# Altium PCB UmbilicalBoardV5.PcbDoc
Units mm, origin at the board's own origin, x right, y up, seen from the top; angles counter-clockwise.
Board outline 89.42 x 93.65 mm, 4 copper layers (Top Layer, GndPlane, PowerPlane, Bottom Layer), stack 0.107 mm thick; 25 components, 56 nets, 222 pads, 36 vias.
Unrouted connection lines stored in the file: 20.
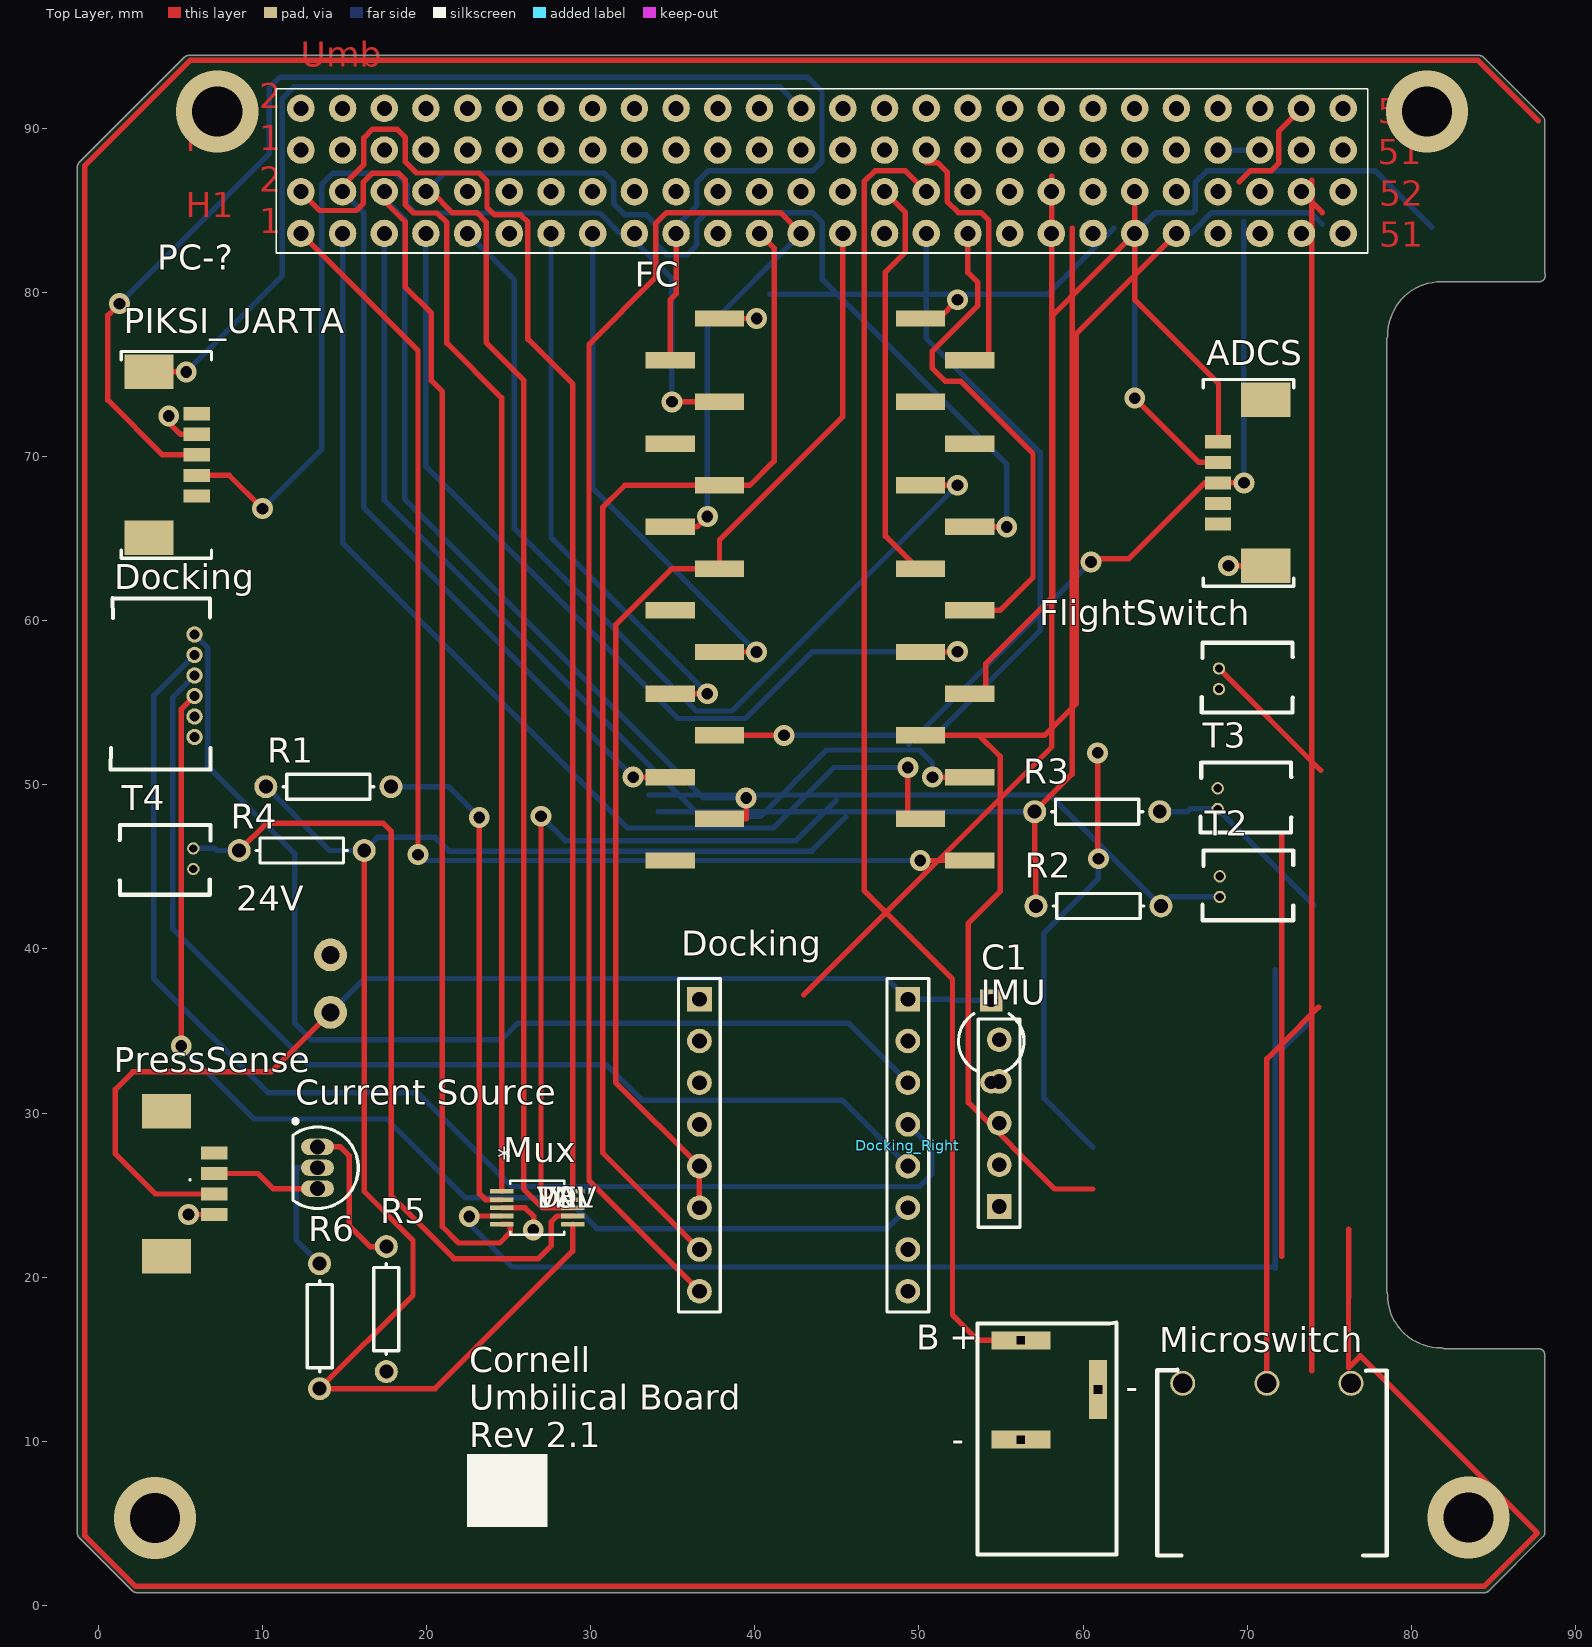
[diagram p0: Top Layer view]
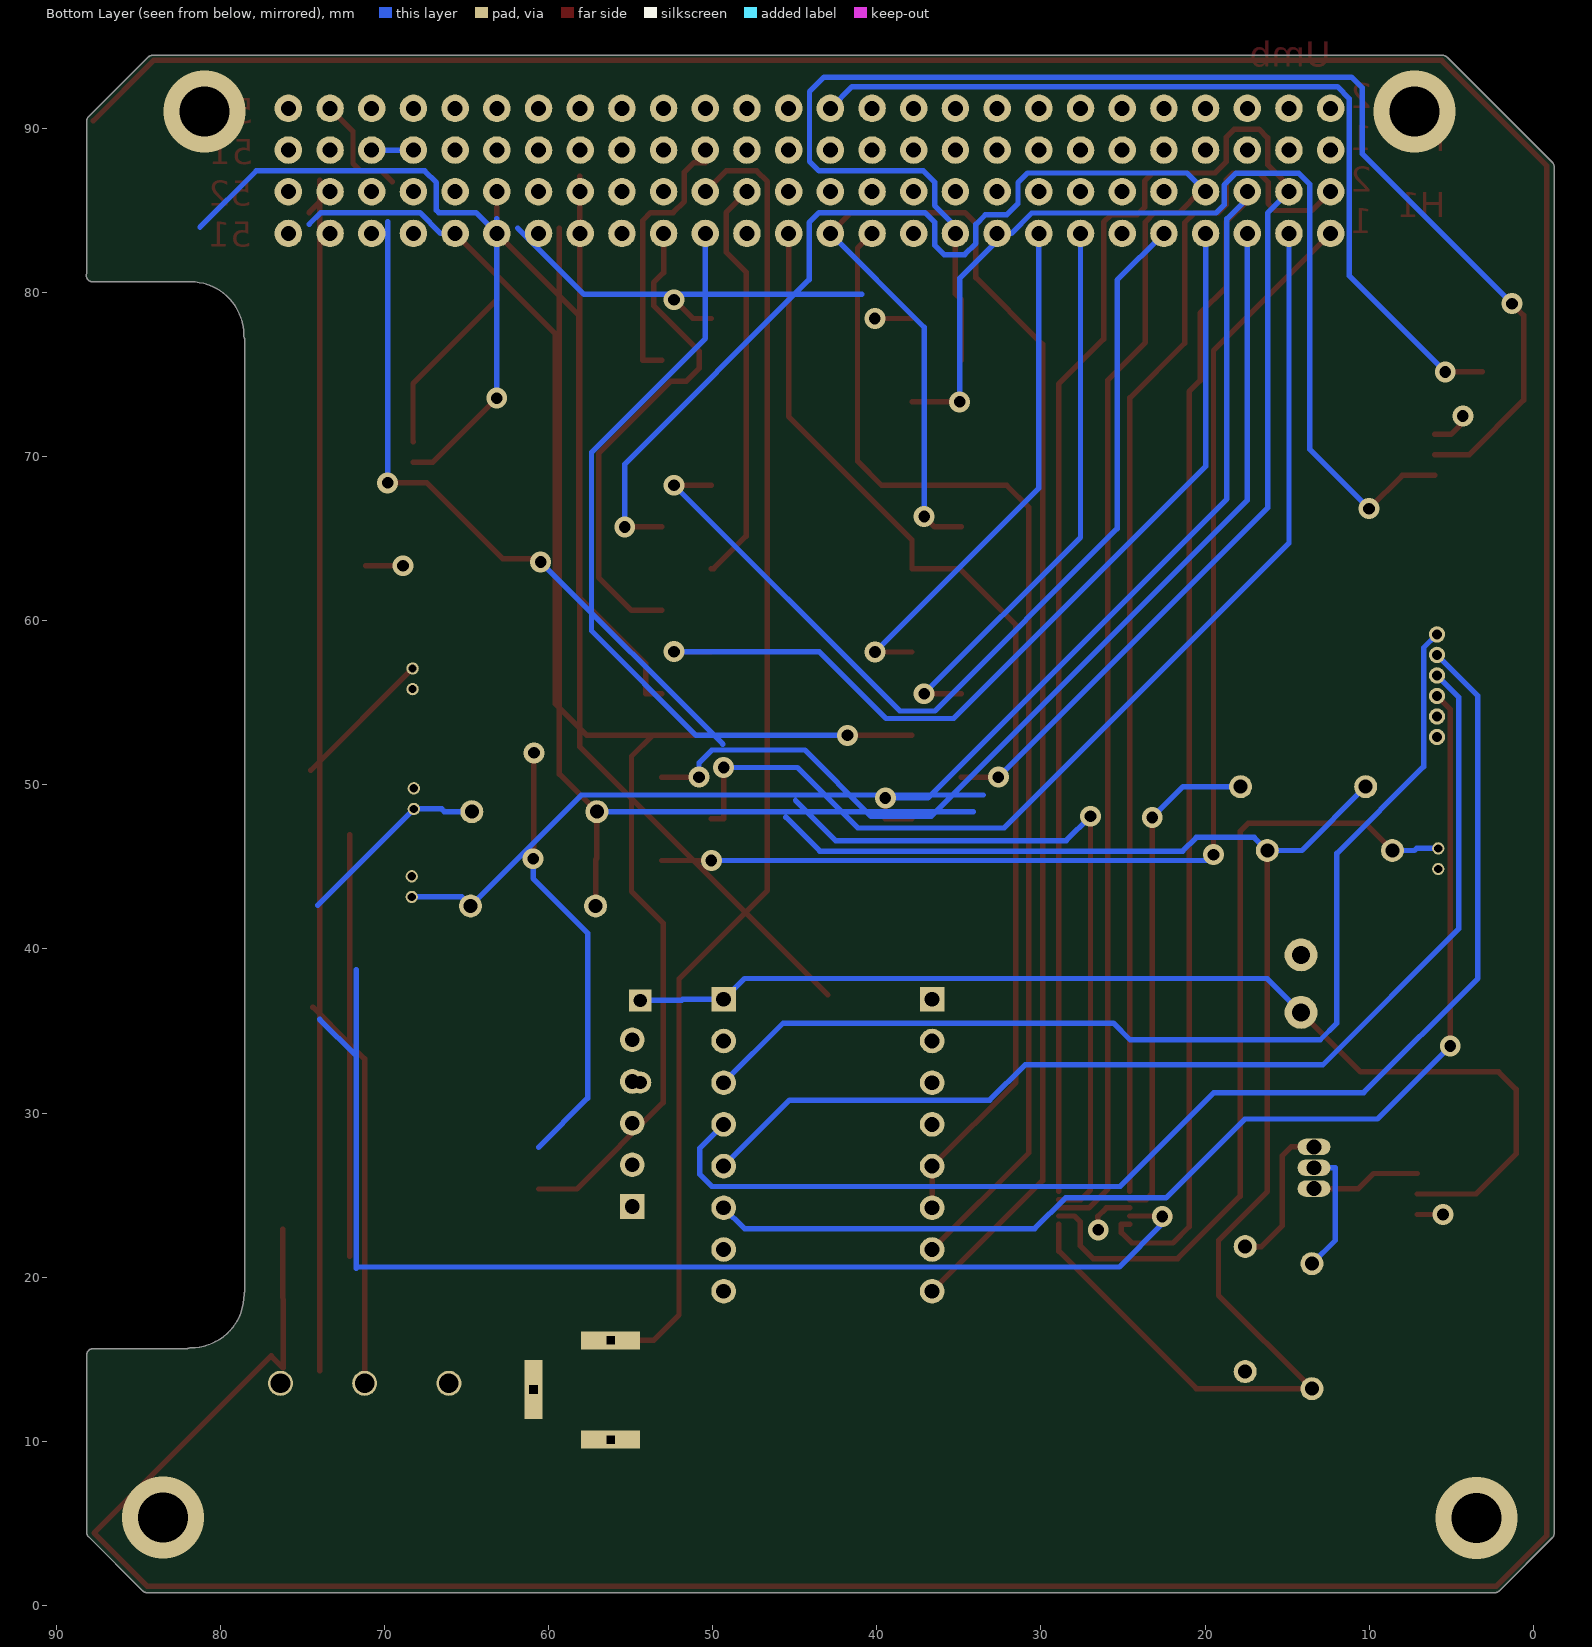
[diagram p1: Bottom Layer view, seen from below]
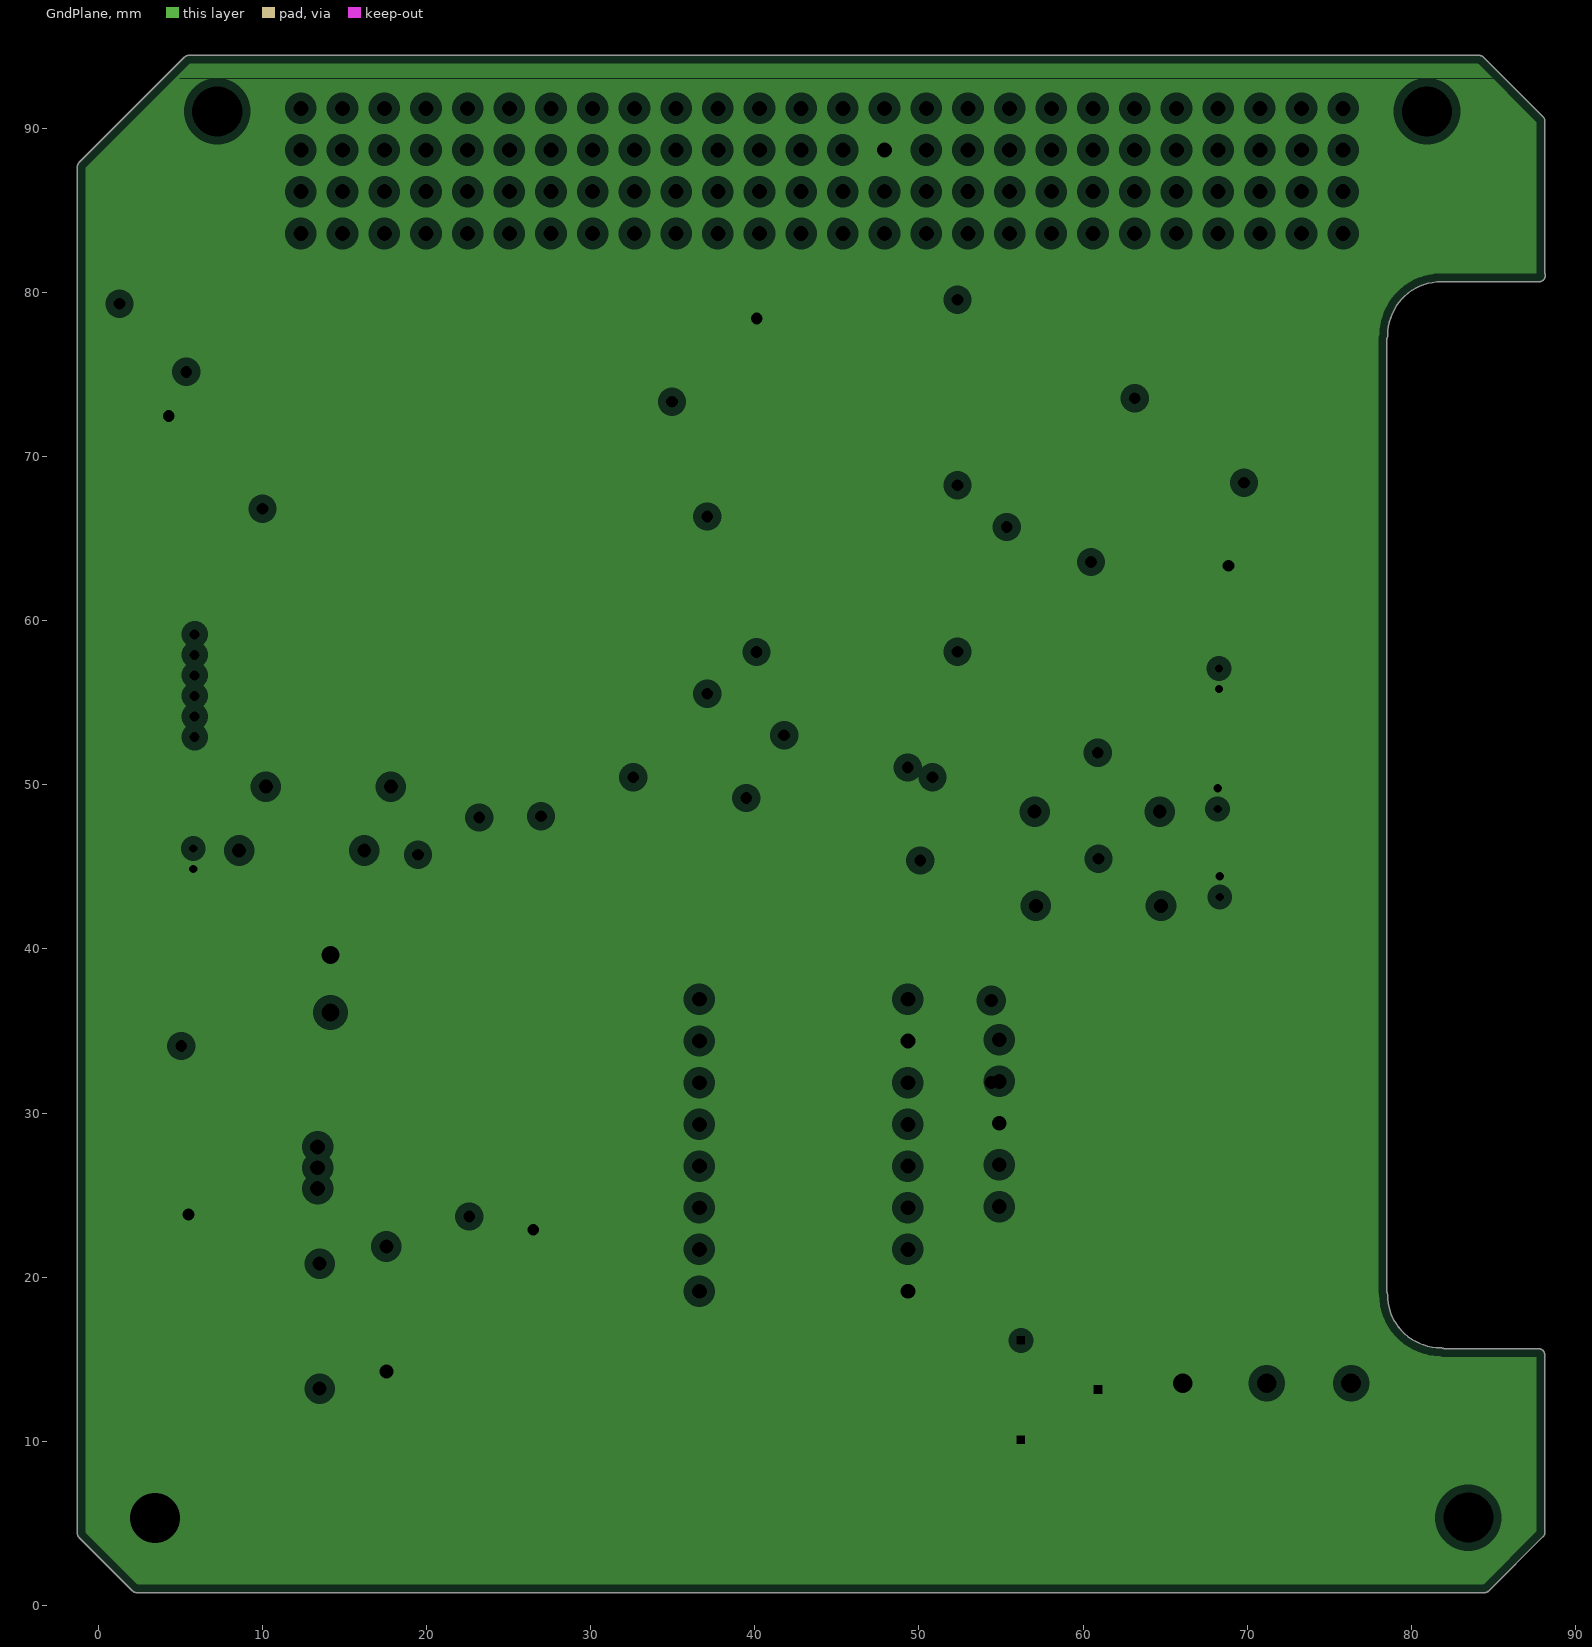
[diagram p2: GndPlane, clearances drawn from the general rule]
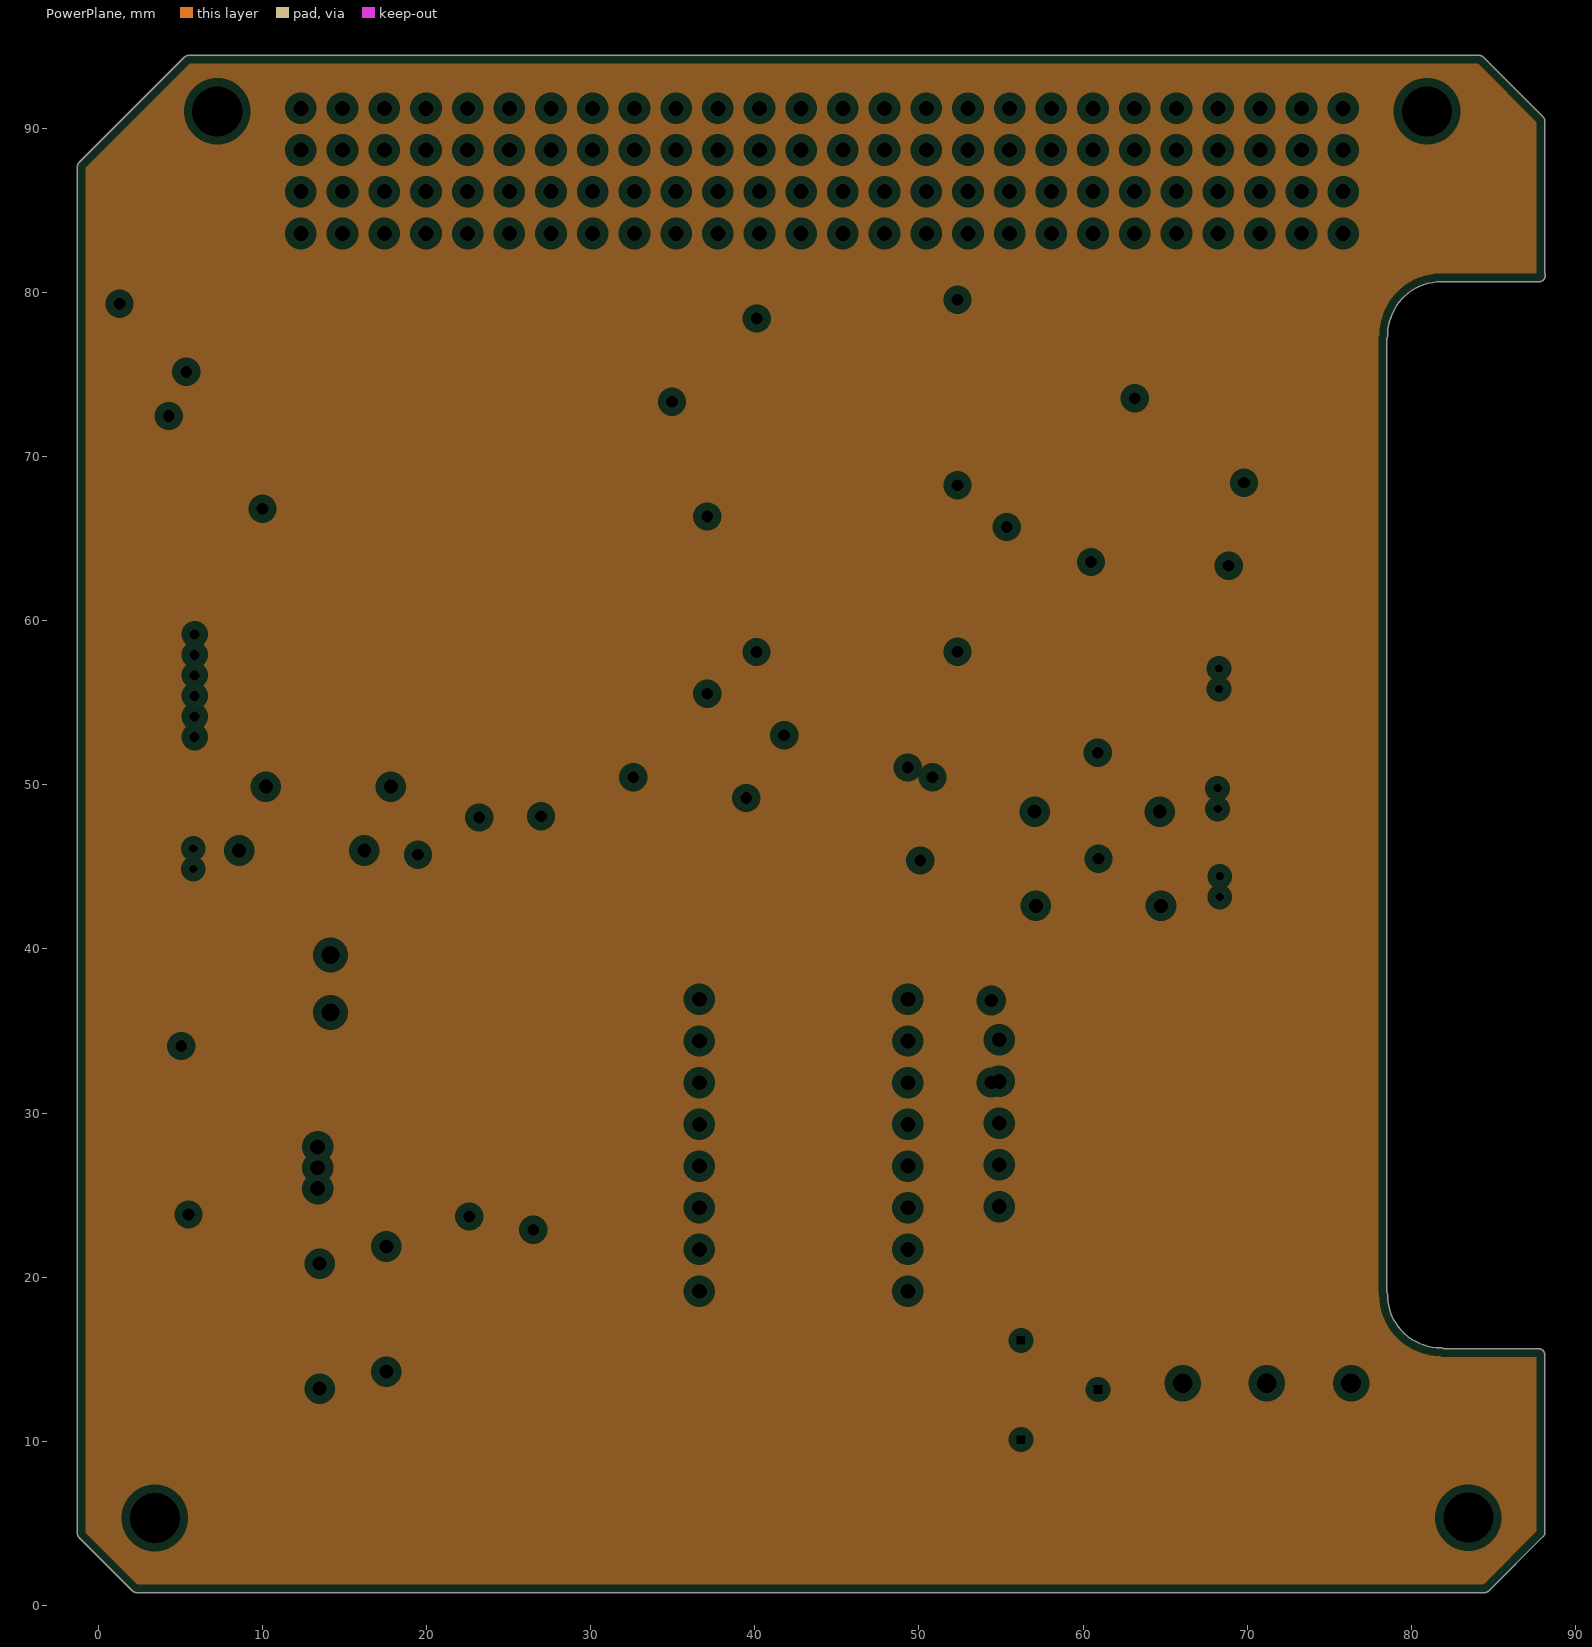
[diagram p3: PowerPlane, clearances drawn from the general rule]

## Layer stack, top to bottom
Top Solder: solder mask 0.0102, Solder Resist, Dk 3.5
Top Layer: signal copper 0.0356
GndPlane: plane copper 0.0178, net DGND
PowerPlane: plane copper 0.0178
Bottom Layer: signal copper 0.0356
Bottom Solder: solder mask 0.0102, Solder Resist, Dk 3.5

## Board outline
2.067,0.899 -1.159,4.125 -1.158,4.124 cw(c-0.889,4.394) -1.27,4.394 -1.27,87.655 cw(c-0.889,87.655) -1.158,87.925 -1.159,87.925 5.242,94.326 cw(c5.512,94.056) 5.512,94.438 84.125,94.438 cw(c84.125,94.056) 84.395,94.326 84.394,94.326 88.027,90.694 88.026,90.694 cw(c87.757,90.424) 88.138,90.424 88.138,81.204 cw(c87.757,81.204) 88.134,81.146 cw(c87.772,81.026) 88.153,81.026 cw(c87.772,81.026) 87.772,80.645 81.803,80.645 cw(c81.803,81.026) 81.802,80.645 ccw(c81.798,77.406) 78.56,77.389 cw(c78.178,77.387) 78.56,77.387 cw(c78.178,77.387) 78.512,77.202 78.512,19.11 cw(c78.163,18.956) 78.545,18.956 cw(c78.163,18.956) 78.545,18.953 ccw(c81.783,18.936) 81.787,15.698 cw(c81.788,15.316) 81.978,15.647 87.747,15.647 cw(c87.747,15.265) 88.128,15.265 88.128,4.558 cw(c87.757,4.47) 88.138,4.47 cw(c87.757,4.47) 88.027,4.201 84.725,0.899 cw(c84.455,1.168) 84.455,0.787 2.337,0.787 cw(c2.337,1.168)

## Design rules (kind name [scope] priority, off if disabled: settings)
Clearance [All] p1: gap=0.254 ignorepadtopadclearanceinfootprint=FALSE except(0: Arc-Hole Track-Hole SMDPad-Hole THPad-Hole Via-Hole Fill-Hole Poly-Hole Region-Hole Text-Hole; 0.127: Track-Track Track-SMDPad Track-THPad SMDPad-SMDPad SMDPad-THPad THPad-THPad)
HoleSize [All] p1: absolutevalues=TRUE maxlimit=3.048 minlimit=0.025 maxpercent=80.000 minpercent=20.000
MinimumSolderMaskSliver [All] p1: minsoldermaskwidth=0.127
PlaneClearance [All] p1: clearance=0.508
PlaneConnect [All] p1: planeconnectstyle=Direct reliefexpansion=0.508 reliefentries=4 reliefconductorwidth=0.254 reliefairgap=0.254
PolygonConnect [All] p1: connectstyle=Direct reliefconductorwidth=0.254 reliefentries=4 polygonreliefangle="90 Angle" airgapwidth=0.254
RoutingVias [All] p1: holewidth=0.711 width=1.27 viastyle="Through Hole" minholewidth=0.711 minwidth=1.27 maxholewidth=0.711 maxwidth=1.27
SilkToSolderMaskClearance [IsPad] p1: minsilkscreentomaskgap=0.05 clearancetoexposedcopper=TRUE
SolderMaskExpansion [All] p1: expansion=0.102
Width [All] p1: maxlimit=0.559 minlimit=0.305 preferedwidth=0.33
25 further rules are at their usual default settings.

## Components (designator, comment, footprint, x,y, rotation, side; value= is the part's Value field where it differs from the comment)
24V "HighVoltageHeader" Header 0.991,41.885 r270 top
ADCS "ADCS" "MOLEX PICOBLADE 5 PIN" 72.624,62.297 r90 top
B "Barrel_Jack" BARREL_JACK 56.209,10.107 r0 top
C1 "Cap2" CAPR5-4X5 54.407,34.366 r270 top value=100uF
"Current Source" "2N3904" TO-92A 13.36,26.67 r180 top
Docking "Docking DRV8825 Header" HDR1X8 36.627,36.932 r270 top (schematic designator Docking_Left)
Docking "Docking 6 Pin molex" "PRESSURE CONNECTOR" 7.067,56.287 r270 top
Docking_Right "Docking DRV8825 Header" HDR1X8 49.327,36.932 r270 top
FC "Teensy 3.2 Headers" "Teensy 3.2 SMD Headers" 34.849,78.41 r0 top
FlightSwitch "RemoverBeforeFlightSwitch" "REMOVERBEFOREFLIGHT SWITCH" 68.275,53.879 r90 top
IMU "Header 5" HDR1X5 54.889,24.308 r90 top
Microswitch "MicroSwitch" MICROSWITCH_3PIN 71.246,13.588 r180 top
Mux "MAX4634EUB+T" 21-0061L 26.746,24.232 r0 top value=Value
PC-? "PC-104" PC-104FOOTPRINT 12.344,83.591 r0 top
PIKSI_UARTA "PIKSI_UART Connector" "MOLEX PICOBLADE 5 PIN" 1.594,76.204 r270 top
PressSense "Connector 4POS Molex PicoBlade" 532610471 7.061,23.82 r0 top
R1 "Resistor" AXIAL-0.3 14.021,49.886 r0 top value=1K
R2 "Resistor" AXIAL-0.3 60.935,42.621 r0 top value=1K
R3 "Resistor" AXIAL-0.3 60.858,48.362 r0 top value=1K
R4 "Resistor" AXIAL-0.3 12.395,45.999 r180 top value=1K
R5 "Resistor" AXIAL-0.3 17.551,18.059 r90 top value=2.8k
R6 "Resistor" AXIAL-0.3 13.487,17.018 r270 top value=1k
T2 "TempSensor1" "REMOVERBEFOREFLIGHT SWITCH" 68.326,41.22 r90 top
T3 "TempSensor1" "REMOVERBEFOREFLIGHT SWITCH" 68.199,46.579 r90 top
T4 "TempSensor2" "REMOVERBEFOREFLIGHT SWITCH" 5.791,48.076 r270 top

## Footprints (in the part's own frame and the unit in brackets; to place one, negate y for a bottom-side part, rotate by r counter-clockwise, add the part's x,y. Pads: shape width x height; smd on the part's side, far side on the other; paste and mask are expansions set on the pad)
21-0061L [mil]
  rect 56x11 smd: 1(-85.5,39.37) 2(-85.5,19.69) 3(-85.5,0) 4(-85.5,-19.68) 5(-85.5,-39.37) 6(85.5,-39.37) 7(85.5,-19.68) 8(85.5,0) 9(85.5,19.69) 10(85.5,39.37)
  silkscreen extent -65,-65 134,65, body extent 0,0 10,10, height 10
532610471 [mm] "Connector 4POS Molex PicoBlade"
  rect 1.6x0.8 smd: 1(0,3.75) 2(0,2.5) 3(0,1.25) 4(0,0)
  rect 3x2.1 smd: ""(-2.9,-2.55) ""(-2.9,6.3)
  silkscreen extent -1.52,2.07 -1.42,2.17, body extent -4.71,-3.81 1.02,7.56, height 0.6
AXIAL-0.3 [mm] "Axial Device, Thru-Hole; 2 Leads; 0.3 in Pin Spacing"
  round 1.4 hole 0.85: 1(-3.81,0) 2(3.81,0)
  silkscreen extent -2.77,-0.76 2.77,0.76
BARREL_JACK [mm] "KLDX-0202-B"
  rect 3.6x1.1 hole 0.5 square: 0(0,0) 2(0,6.05)
  rect 1.1x3.6 hole 0.5 square: 1(4.7,3.05)
  silkscreen extent -2.65,-7 5.82,7.12
CAPR5-4X5 [mm] "Capacitor; 2 Leads"
  rect 1.35x1.35 hole 0.8: 1(-2.5,0)
  round 1.35 hole 0.8: 2(2.5,0)
  silkscreen extent -1.69,-2 1.82,2
HDR1X5 [mm] "Connector; Header; 5 Position"
  rect 1.5x1.5 hole 0.9: 1(0,0)
  round 1.5 hole 0.9: 2(2.54,0) 3(5.08,0) 4(7.62,0) 5(10.16,0)
  silkscreen extent -1.27,-1.27 11.43,1.27
HDR1X8 [mm] "Connector; Header; 8 Position"
  rect 1.5x1.5 hole 0.9: 1(0,0)
  round 1.5 hole 0.9: 2(2.54,0) 3(5.08,0) 4(7.62,0) 5(10.16,0) 6(12.7,0) 7(15.24,0) 8(17.78,0)
  silkscreen extent -1.27,-1.27 19.05,1.27
Header [mm] "High Voltage Connector"
  round 2 hole 1.1: 1(5.75,13.16) 2(2.25,13.16)
  body extent 1.02,0.89 6.86,14.6, height 0.25
MICROSWITCH_3PIN [mm] "Omron Electronics Inc-EMC Div D2FS-FL-N-A1"
  round 1.524 hole 1.2: 1(-5.08,0.05) 2(0.05,0.05) 3(5.18,0.05)
  silkscreen extent -7.25,-0.77 6.73,10.55, body extent -7.25,-0.75 6.73,10.55
"MOLEX PICOBLADE 5 PIN" [mm] "Molex Picoblade Header, SMT, Right Angle  53261-0571"
  rect 0.8x1.6 smd: 1(3.6,4.4) 2(4.85,4.4) 3(6.1,4.4) 4(7.35,4.4) 5(8.6,4.4)
  rect 2.1x3 smd: ""(1.05,1.5) ""(11.15,1.5)
  silkscreen extent -0.2,-0.2 12.4,5.3, body extent 0.4,0 11.8,5.2, height 3.4
PC-104FOOTPRINT [mm]
  round 1.676 hole 0.914 mask+0.076: H1_1(0,0) H1_2(0,2.54) H1_3(2.54,0) H1_4(2.54,2.54) H1_5(5.08,0) H1_6(5.08,2.54) H1_7(7.62,0) H1_8(7.62,2.54) H1_9(10.16,0) H1_10(10.16,2.54) H1_11(12.7,0) H1_12(12.7,2.54) H1_13(15.24,0) H1_14(15.24,2.54) H1_15(17.78,0) H1_16(17.78,2.54) H1_17(20.32,0) H1_18(20.32,2.54) H1_19(22.86,0) H1_20(22.86,2.54) H1_21(25.4,0) H1_22(25.4,2.54) H1_23(27.94,0) H1_24(27.94,2.54) H1_25(30.48,0) H1_26(30.48,2.54) H1_27(33.02,0) H1_28(33.02,2.54) H1_29(35.56,0) H1_30(35.56,2.54) H1_31(38.1,0) H1_32(38.1,2.54) H1_33(40.64,0) H1_34(40.64,2.54) H1_35(43.18,0) H1_36(43.18,2.54) H1_37(45.72,0) H1_38(45.72,2.54) H1_39(48.26,0) H1_40(48.26,2.54) H1_41(50.8,0) H1_42(50.8,2.54) H1_43(53.34,0) H1_44(53.34,2.54) H1_45(55.88,0) H1_46(55.88,2.54) H1_47(58.42,0) H1_48(58.42,2.54) H1_49(60.96,0) H1_50(60.96,2.54) H1_51(63.5,0) H1_52(63.5,2.54) H2_1(0,5.08) H2_2(0,7.62) H2_3(2.54,5.08) H2_4(2.54,7.62) H2_5(5.08,5.08) H2_6(5.08,7.62) H2_7(7.62,5.08) H2_8(7.62,7.62) H2_9(10.16,5.08) H2_10(10.16,7.62) H2_11(12.7,5.08) H2_12(12.7,7.62) H2_13(15.24,5.08) H2_14(15.24,7.62) H2_15(17.78,5.08) H2_16(17.78,7.62) H2_17(20.32,5.08) H2_18(20.32,7.62) H2_19(22.86,5.08) H2_20(22.86,7.62) H2_21(25.4,5.08) H2_22(25.4,7.62) H2_23(27.94,5.08) H2_24(27.94,7.62) H2_25(30.48,5.08) H2_26(30.48,7.62) H2_27(33.02,5.08) H2_28(33.02,7.62) H2_29(35.56,5.08) H2_30(35.56,7.62) H2_31(38.1,5.08) H2_32(38.1,7.62) H2_33(40.64,5.08) H2_34(40.64,7.62) H2_35(43.18,5.08) H2_36(43.18,7.62) H2_37(45.72,5.08) H2_38(45.72,7.62) H2_39(48.26,5.08) H2_40(48.26,7.62) H2_41(50.8,5.08) H2_42(50.8,7.62) H2_43(53.34,5.08) H2_44(53.34,7.62) H2_45(55.88,5.08) H2_46(55.88,7.62) H2_47(58.42,5.08) H2_48(58.42,7.62) H2_49(60.96,5.08) H2_50(60.96,7.62) H2_51(63.5,5.08) H2_52(63.5,7.62)
  silkscreen extent -1.5,-1.19 65,8.81
"PRESSURE CONNECTOR" [mm] "53048-0610"
  round 1 hole 0.6 mask+0.076: 1(-2.875,-1.2) 2(-1.625,-1.2) 3(-0.375,-1.2) 4(0.875,-1.2) 5(2.125,-1.2) 6(3.375,-1.2)
  silkscreen extent -5.07,-6.32 5.35,-0.23, body extent -4.45,-6.08 4.8,-0.58, height 1.75
"REMOVERBEFOREFLIGHT SWITCH" [mm] "Molex Picoblade Part Number: 53048-0210"
  round 0.75 hole 0.5: 1(1.95,0) 2(3.205,0)
  silkscreen extent 0.53,-4.5 4.78,1.05, body extent 0.53,-4.47 4.78,1.03, height 4.05
"Teensy 3.2 SMD Headers" [mm]
  rect 3x1 smd: 1(3,0) 2(0,-2.54) 3(3,-5.08) 4(0,-7.62) 5(3,-10.16) 6(0,-12.7) 7(3,-15.24) 8(0,-17.78) 9(3,-20.32) 10(0,-22.86) 11(3,-25.4) 12(0,-27.94) 13(3,-30.48) 14(0,-33.02) 20(18.24,-33.02) 21(15.24,-30.48) 22(18.24,-27.94) 23(15.24,-25.4) 24(18.24,-22.86) 25(15.24,-20.32) 26(18.24,-17.78) 27(15.24,-15.24) 28(18.24,-12.7) 29(15.24,-10.16) 30(18.24,-7.62) 31(15.24,-5.08) 32(18.24,-2.54) 33(15.24,0)
  body extent -1.09,-34.49 19.35,1.16, height 0.25
TO-92A [mm] "TO, Flat Index; 3 In-Line, Axial Leads; Body Dia. 4.5mm; Leads 0.51 x 0.48 mm (max)"
  oval 2x1 hole 0.9: 1(0,-1.27) 2(0,0) 3(0,1.27)
  silkscreen extent -2.48,-2.95 1.5,2.48, body extent -2.48,-2.5 1.5,2.5, height 6.86

## Part data
ADCS: library part "PIKSI_UART Connector", "Molex Picoblade 53261-0571"
C1: "Capacitor", PackageDescription="Capacitor; 2 Leads", PackageReference=CAPR5-4X5, Published=23-Sep-2002, Publisher="Altium Limited"
"Current Source": "NPN General Purpose Amplifier", ComponentLink1Description="Manufacturer Link", ComponentLink1URL=http://www.fairchildsemi.com/, ComponentLink2Description=Datasheet, ComponentLink2URL=http://www.fairchildsemi.com/ds/2N%2F2N3904.pdf, DatasheetVersion=1997, LatestRevisionDate=15-Jan-2003, LatestRevisionNote="PCB Footprint 'BCY-W3/D4.7' replaced", PackageDescription="TO, Flat Index; 3 In-Line, Axial Leads; Body Dia. 4.5mm; Leads 0.51 x 0.48 mm (max)", PackageReference=TO-92A, PackageVersion=Sep-1998, Published=8-Jun-2000, Publisher="Altium Limited"
Docking Docking_Right: library part "Header 8", "Header, 8-Pin", LatestRevisionDate=17-Jul-2002, LatestRevisionNote="Re-released for DXP Platform.", Publisher="Altium Limited"
Docking: library part PressureConnector, "Molex 70553-0005"
FlightSwitch: "53048-0210 Molex Picoblade"
IMU: "Header, 5-Pin", LatestRevisionDate=17-Jul-2002, LatestRevisionNote="Re-released for DXP Platform.", Publisher="Altium Limited"
Microswitch: "Omron Electronics Inc-EMC Div D2FS-FL-N-A1"
Mux: "Imported", C="Copyright (C) 2015 Accelerated Designs. All rights reserved", Manufacturer_Part_Number=MAX4634EUB+T, RefDes=RefDes, Type=Type, Vendor="Maxim Integrated Products"
PC-?: "ESQ-126-14-G-D (2 total needed)"
PIKSI_UARTA: "Molex Picoblade 53261-0571"
PressSense: library part 532610471
R1 R2 R3 R4 R5 R6: library part Res1, LatestRevisionDate=17-Jul-2002, LatestRevisionNote="Re-released for DXP Platform.", PackageDescription="Axial Device, Thru-Hole; 2 Leads; 0.3 in Pin Spacing", PackageReference=AXIAL-0.3, Published=8-Jun-2000, Publisher="Altium Limited"
T2 T3 T4: library part RemoverBeforeFlightSwitch, "53048-0210 Molex Picoblade"

## Via types
v1: diameter 1.27, hole 0.711, Top Layer to Bottom Layer, 32 vias
v2: diameter 5, hole 3.048, Top Layer to Bottom Layer, 4 vias

## Nets (pads, with @x,y where several pads share a name; then routed paths per layer and width w, separated by ;. In a path a pad name is that pad's centre, name@x,y a point inside that pad or via, vN(x,y) a via of type N, cw(c..) or ccw(c..) an arc to the next point about the centre after c; other vN are vias at no path point)
3.3_ADCS: ADCS.1
3.3_Valves135: PC-?.H2_28
3.3_Valves246: PC-?.H2_27
5_ADCS: ADCS.4 PC-?.H1_50 | length 18.2
  Top Layer w0.33: 63.145,85.191 63.145,79.552 68.25,74.447 68.25,70.897 68.224,70.897 ; PC-?.H1_50 74.575,84.861
5_IMU: PC-?.H2_25
5_Valves: PC-?.H1_48
5V_BattChargeIn: B.2 PC-?.H1_32 | length 80.7
  Top Layer w0.33: PC-?.H1_32 49.175,87.401 47.32,87.401 46.66,86.741 46.66,43.561 52.045,38.176 52.045,17.703 53.591,16.157 B.2
5V_IMU: IMU.4
5V_Piksi: PC-?.H2_26 PIKSI_UARTA.5 | length 53.8
  Top Layer w0.33: 3.094,75.154 v1(5.359,75.154)
  Bottom Layer w0.33: v1(5.359,75.154) 11.201,80.996 11.201,91.795 11.938,92.532 41.504,92.532 PC-?.H2_26
5V_Teensy1: FC.33 PC-?.H1_49 | length 25.4
  Top Layer w0.33: FC.33 51.206,78.41 v1(52.349,79.553)
  Bottom Layer w0.33: 40.919,79.883 57.836,79.883 61.874,83.922
5V_Teensy2: PC-?.H1_51
5V_TempSensors: Mux.6 PC-?.H1_47 R1.1 R2.1 R3.1 R4.1 R6.2 | length 160.6
  Top Layer w0.33: R4.1 16.205,25.222 19.177,22.25 19.177,18.898 R6.2 20.523,13.208 28.905,21.59 28.905,23.232 Mux.6 ; R2.1 57.125,45.44 57.048,45.517 R3.1 59.334,50.648 59.334,83.922
  Bottom Layer w0.33: R1.1 14.097,45.999 R4.1 17.005,46.799 20.523,46.799 21.361,45.961 43.465,45.961 45.535,48.031 ; 34.105,48.362 R3.1
24V: PC-?.H2_39
24V_1: PC-?.H2_49
24V_2: 24V.1 C1.1 Docking_Right.1 PC-?.H2_50 PressSense.3 | length 130.6
  Top Layer w0.33: PressSense.3 3.48,25.07 1.041,27.508 1.041,31.445 2.108,32.512 10.528,32.512 24V.1 ; 42.977,37.196 58.09,52.309 58.09,87.071 ; 69.52,86.741 70.18,87.401 71.45,87.401 71.907,87.858 71.907,89.814 PC-?.H2_50
  Bottom Layer w0.33: 24V.1 16.217,38.201 48.057,38.201 Docking_Right.1 51.816,36.932 51.881,36.866 C1.1
24V_3: PC-?.H2_51
24V_4: PC-?.H2_52
24V_SAH_enable: FC.11 PC-?.H1_31 | length 49.2
  Top Layer w0.33: FC.11 v1(41.783,53.01)
  Bottom Layer w0.33: v1(41.783,53.01) 51.003,53.01 57.379,59.385 57.379,70.256 50.444,77.19 PC-?.H1_31
24V_SAH_enable2: FC.27 PC-?.H1_30 | length 25
  Top Layer w0.33: PC-?.H1_30 49.174,84.861 49.174,82.448 47.955,81.229 47.955,65.151 49.936,63.17 FC.27
AGND: FC.32 PC-?.H2_31 | length 16.8
  Top Layer w0.33: PC-?.H2_31 50.444,87.909 51.13,87.909 51.714,87.325 51.714,85.547 52.4,84.861 53.772,84.861 54.254,84.379 54.254,75.87 FC.32
DGND: 24V.2 ADCS.5 B.0 B.1 C1.2 Docking_Right.2 Docking_Right.8 FC.1 FlightSwitch.1 IMU.3 Microswitch.3 Mux.3 PC-?.H2_29 PIKSI_UARTA.1 PressSense.4 R5.1 T2.2 T3.2 T4.2 | length 11.5
  Top Layer w0.33: v1(4.292,72.466) 4.292,72.085 5.023,71.354 5.994,71.354 ; v1(5.499,23.82) PressSense.4 ; Mux.3 26.01,24.232 26.535,23.706 26.535,22.92 v1(26.501,22.885) ; FC.1 v1(40.111,78.41) ; v1(68.862,63.347) 71.124,63.347
  other v2: 3.449,5.326
Docking1: Docking.7 FC.5 PC-?.H1_23 | length 73.5
  Top Layer w0.33: Docking.7 30.734,27.585 30.734,66.904 32.08,68.25 FC.5 39.7,68.25 41.173,69.723 41.173,82.703 PC-?.H1_23
Docking2: Docking.8 FC.6 PC-?.H1_25 | length 101.3
  Top Layer w0.33: FC.6 36.474,65.71 v1(37.109,66.345) ; Docking.8 29.896,25.883 29.896,76.835 33.96,80.899 33.96,84.201 34.62,84.861 41.555,84.861 PC-?.H1_25
  Bottom Layer w0.33: v1(37.109,66.345) 37.109,77.876 PC-?.H1_25
Docking_en: Docking.5@36.627,26.772 Docking.6@36.627,24.232 FC.7 PC-?.H1_27 | length 68.9
  Top Layer w0.33: Docking.6@36.627,24.232 36.627,26.772 31.521,31.877 31.521,59.741 34.95,63.17 FC.7 37.849,64.925 45.364,72.441 PC-?.H1_27
EPS_RX: PC-?.H2_38
EPS_TX: PC-?.H2_36
Motor1: Docking.1@5.867,59.162 Docking_Right.3 | length 65.9
  Bottom Layer w0.33: Docking.1@5.867,59.162 6.68,58.349 6.68,51.105 11.963,45.821 11.963,35.484 12.979,34.468 24.562,34.468 25.578,35.484 45.695,35.484 Docking_Right.3
Motor2: Docking.2@5.867,57.912 Docking_Right.4 | length 77.3
  Bottom Layer w0.33: Docking.2@5.867,57.912 3.378,55.423 3.378,38.2 10.336,31.242 19.456,31.242 25.171,25.527 50.038,25.527 50.775,26.264 50.775,27.864 Docking_Right.4
Motor3: Docking.3@5.867,56.662 Docking_Right.5 | length 66.8
  Bottom Layer w0.33: Docking.3@5.867,56.662 4.547,55.341 4.547,41.224 12.827,32.944 30.962,32.944 33.121,30.785 45.314,30.785 Docking_Right.5
Motor4: Docking.4@5.867,55.412 Docking_Right.6 | length 71.1
  Top Layer w0.33: v1(5.054,34.087) 5.054,54.599 Docking.4@5.867,55.412
  Bottom Layer w0.33: v1(5.054,34.087) 9.499,29.642 17.577,29.642 22.377,24.841 28.499,24.841 30.378,22.961 48.057,22.961 Docking_Right.6
mux1: Mux.2 R1.2 | length 30.6
  Top Layer w0.33: v1(23.215,48.006) 23.215,25.095 23.579,24.732 Mux.2
  Bottom Layer w0.33: R1.2 21.336,49.886 v1(23.215,48.006)
mux2: Mux.9 R2.2 T2.1 | length 82.4
  Top Layer w0.33: v1(26.975,48.082) 26.975,25.316 27.559,24.732 Mux.9
  Bottom Layer w0.33: v1(26.975,48.082) 28.46,46.596 42.5,46.596 44.95,49.047 ; 33.52,49.377 57.988,49.377 R2.2 65.293,43.17 T2.1
mux3: Mux.4 R3.2 T3.1 | length 86.9
  Top Layer w0.33: v1(22.606,23.698) 22.14,23.698 22.107,23.732 Mux.4
  Bottom Layer w0.33: v1(22.606,23.698) 22.606,23.232 25.214,20.625 71.704,20.625 ; R3.2 66.345,48.362 66.512,48.529 T3.1 74.066,42.662 ; 71.704,20.549 71.704,20.625 ; 71.704,38.725 71.704,33.477 ; 73.939,35.712 71.704,33.477 ; 71.704,20.625 71.704,33.477
mux4: Mux.7 R4.2 T4.1 | length 49.8
  Top Layer w0.33: R4.2 10.236,47.65 17.373,47.65 17.856,47.168 17.856,24.943 21.666,21.133 26.822,21.133 27.61,21.92 27.61,23.389 27.952,23.732 Mux.7
  Bottom Layer w0.33: T4.1 7.112,46.126 7.239,45.999 R4.2
"NetCurrent Source_1": "Current Source.1" R5.2 | length 9.2
  Top Layer w0.33: 13.36,27.94 14.757,27.94 15.291,27.407 15.291,23.139 16.561,21.869 R5.2
"NetCurrent Source_2": "Current Source.2" R6.1 | length 7.7
  Bottom Layer w0.33: 13.36,26.67 12.065,26.67 12.065,22.251 R6.1
"NetCurrent Source_3": "Current Source.3" PressSense.2 | length 6.7
  Top Layer w0.33: PressSense.2 9.728,26.32 10.648,25.4 13.36,25.4
NetFlightSwitch_2: FlightSwitch.2 Microswitch.2 | length 58.6
  Top Layer w0.33: FlightSwitch.2 74.473,50.887 ; Microswitch.2 71.196,33.299 72.111,34.214 ; 72.111,21.285 72.111,34.214 ; 72.111,46.95 72.111,34.214 ; 74.346,36.449 72.111,34.214
Piksi_RX: FC.2 PC-?.H1_19 PIKSI_UARTA.2 | length 88.1
  Top Layer w0.33: v1(1.295,79.315) 0.584,78.604 0.584,73.431 3.912,70.104 5.994,70.104 ; FC.2 34.849,79.553 35.204,79.908 PC-?.H1_19
  Bottom Layer w0.33: v1(1.295,79.315) 10.414,88.434 10.414,92.456 11.074,93.116 43.205,93.116 44.094,92.227 44.094,87.986 43.51,87.401 37.16,87.401 36.474,86.715 36.474,85.293 35.204,84.023 PC-?.H1_19
Piksi_TX: FC.3 PC-?.H1_17 PIKSI_UARTA.3 | length 61.8
  Top Layer w0.33: 5.994,68.854 7.981,68.854 v1(10.007,66.827) ; v1(34.95,73.33) FC.3
  Bottom Layer w0.33: v1(10.007,66.827) 13.614,70.434 13.614,86.576 14.3,87.262 18.11,87.262 18.834,86.537 18.834,85.331 19.329,84.836 30.556,84.836 31.8,83.591 PC-?.H1_17 32.664,83.134 34.95,80.848 v1(34.95,73.33)
Pressure1: FC.26 PC-?.H1_33 | length 30.2
  Top Layer w0.33: PC-?.H1_33 52.984,81.204 53.594,80.594 53.594,79.197 50.8,76.403 50.8,75.387 51.613,74.574 52.553,74.574 56.947,70.18 56.947,62.637 54.94,60.63 FC.26
Quake_RX: FC.9 PC-?.H1_15 | length 31.9
  Top Layer w0.33: FC.9 v1(40.106,58.09)
  Bottom Layer w0.33: PC-?.H1_15 30.124,68.072 v1(40.106,58.09)
Quake_TX: FC.10 PC-?.H1_13 | length 34.2
  Top Layer w0.33: FC.10 v1(37.109,55.55)
  Bottom Layer w0.33: PC-?.H1_13 27.584,65.075 v1(37.109,55.55)
Teensy2_Reset: FC.4
Teensy2_SCL: ADCS.3 FC.23 IMU.1 PC-?.H1_43 | length 102.3
  Top Layer w0.33: FC.23 53.67,53.01 ; 60.604,25.375 58.268,25.375 53.01,30.632 53.01,41.58 54.94,43.51 54.94,51.74 53.67,53.01 ; v1(63.144,73.558) 67.056,69.647 68.224,69.647 ; PC-?.H1_43 59.588,77.495 59.588,54.94 57.658,53.01 53.67,53.01
  Bottom Layer w0.33: v1(63.144,73.558) 63.144,84.48 ; PC-?.H1_43 66.561,83.591 67.831,84.861 73.863,84.861 74.574,84.15
Teensy2_SDA: ADCS.2 FC.24 IMU.2 PC-?.H1_41 | length 124.1
  Top Layer w0.33: FC.24 54.076,55.55 54.076,57.378 58.166,61.468 58.166,78.613 PC-?.H1_41 ; v1@60.477,63.779 62.789,63.779 67.406,68.397 v1(69.799,68.397) ; v1@60.884,45.694 v1(60.884,51.943)
  Bottom Layer w0.33: 49.378,52.477 v1(60.477,63.576) ; 60.604,27.915 57.607,30.912 57.607,40.97 60.934,44.297 v1(60.934,45.491) ; PC-?.H1_41 64.414,84.861 66.675,84.861 66.827,85.014 66.827,86.69 67.538,87.401 77.8,87.401 81.229,83.972 ; v1(69.799,68.397) 69.799,84.302
TempMuxA0: Mux.1 PC-?.H1_2 | length 73.6
  Top Layer w0.33: PC-?.H1_2 13.488,84.988 15.722,84.988 16.154,85.42 16.154,86.715 16.7,87.262 18.3,87.262 18.694,86.868 18.694,85.344 19.202,84.836 20.65,84.836 21.234,84.252 21.234,76.911 24.575,73.571 Mux.1
TempMuxA1: FC.12 Mux.10 PC-?.H1_4 | length 123.6
  Top Layer w0.33: PC-?.H1_4 14.884,86.487 16.18,87.782 16.18,89.408 16.713,89.941 18.212,89.941 18.694,89.459 18.694,87.96 19.38,87.274 23.19,87.274 23.682,86.782 23.682,85.179 24.139,84.722 25.73,84.722 26.175,84.277 26.175,77.153 28.918,74.409 Mux.10 ; v1(32.587,50.47) FC.12
  Bottom Layer w0.33: PC-?.H1_4 16.18,84.836 16.18,66.877 v1(32.587,50.47)
TempMuxEN: FC.13 Mux.5 PC-?.H1_6 | length 120.8
  Top Layer w0.33: PC-?.H1_6 17.424,85.572 18.694,84.302 18.694,80.34 20.294,78.74 20.294,74.625 20.967,73.952 20.967,23.076 21.959,22.085 24.46,22.085 25.095,22.72 25.095,23.232 Mux.5 ; FC.13 39.471,47.93 v1(39.471,49.2)
  Bottom Layer w0.33: PC-?.H1_6 17.424,85.725 18.669,84.48 18.669,67.41 36.879,49.2 v1(39.471,49.2)
TempMuxRead: FC.28 Mux.8 PC-?.H1_8 | length 123.5
  Top Layer w0.33: PC-?.H1_8 20.295,86.131 21.565,84.861 23.063,84.861 23.635,84.29 23.635,76.949 25.92,74.663 25.92,25.387 27.076,24.232 Mux.8 ; FC.28 v1(55.346,65.71)
  Bottom Layer w0.33: PC-?.H1_8 21.107,87.274 30.81,87.274 31.394,86.69 31.394,85.407 32.08,84.722 33.388,84.722 33.96,84.15 33.96,82.981 34.645,82.296 35.89,82.296 36.474,82.88 36.474,84.277 37.058,84.861 43.51,84.861 44.12,84.252 44.12,80.772 55.346,69.545 v1(55.346,65.71)
Valve1: FC.20 PC-?.H1_1 | length 74.6
  Top Layer w0.33: PC-?.H1_1 19.482,76.454 v1(19.482,45.745) ; v1(50.076,45.39) FC.20
  Bottom Layer w0.33: v1(19.482,45.745) 19.837,45.39 v1(50.076,45.39)
Valve2: FC.21 PC-?.H1_3 | length 65.9
  Top Layer w0.33: v1(49.327,51.054) 49.327,47.93 FC.21
  Bottom Layer w0.33: PC-?.H1_3 14.884,64.719 32.232,47.371 41.148,47.371 44.831,51.054 v1(49.327,51.054)
Valve3: FC.22 PC-?.H1_5 | length 62.8
  Top Layer w0.33: v1(50.825,50.47) FC.22
  Bottom Layer w0.33: PC-?.H1_5 17.424,67.347 36.689,48.082 40.335,48.082 44.374,52.121 50.038,52.121 50.825,51.333 v1(50.825,50.47)
Valve4: FC.25 PC-?.H1_7 | length 56.9
  Top Layer w0.33: FC.25 52.324,58.09 v1(52.349,58.115)
  Bottom Layer w0.33: PC-?.H1_7 19.964,69.392 35.318,54.039 39.434,54.039 43.51,58.115 v1(52.349,58.115)
Valve5: FC.29 PC-?.H1_9 | length 58.7
  Top Layer w0.33: FC.29 v1(52.349,68.25)
  Bottom Layer w0.33: PC-?.H1_9 25.349,80.747 25.349,65.608 36.461,54.496 38.595,54.496 v1(52.349,68.25)
VBatt: PC-?.H2_45 PC-?.H2_47 | length 2.5
  Bottom Layer w0.33: PC-?.H2_45 PC-?.H2_47
pads on no net: ADCS. Docking.1@36.627,36.932 Docking.2@36.627,34.392 Docking.3@36.627,31.852 Docking.4@36.627,29.312 Docking.5@5.867,54.162 Docking.6@5.867,52.912 Docking_Right.7 FC.8 FC.14 FC.30 FC.31 IMU.5 Microswitch.1 PC-?.H1_10 PC-?.H1_11 PC-?.H1_12 PC-?.H1_14 PC-?.H1_16 PC-?.H1_18 PC-?.H1_20 PC-?.H1_21 PC-?.H1_22 PC-?.H1_24 PC-?.H1_26 PC-?.H1_28 PC-?.H1_29 PC-?.H1_34 PC-?.H1_35 PC-?.H1_36 PC-?.H1_37 PC-?.H1_38 PC-?.H1_39 PC-?.H1_40 PC-?.H1_42 PC-?.H1_44 PC-?.H1_45 PC-?.H1_46 PC-?.H1_52 PC-?.H2_1 PC-?.H2_2 PC-?.H2_3 PC-?.H2_4 PC-?.H2_5 PC-?.H2_6 PC-?.H2_7 PC-?.H2_8 PC-?.H2_9 PC-?.H2_10 PC-?.H2_11 PC-?.H2_12 PC-?.H2_13 PC-?.H2_14 PC-?.H2_15 PC-?.H2_16 PC-?.H2_17 PC-?.H2_18 PC-?.H2_19 PC-?.H2_20 PC-?.H2_21 PC-?.H2_22 PC-?.H2_23 PC-?.H2_24 PC-?.H2_30 PC-?.H2_32 PC-?.H2_33 PC-?.H2_34 PC-?.H2_35 PC-?.H2_37 PC-?.H2_40 PC-?.H2_41 PC-?.H2_42 PC-?.H2_43 PC-?.H2_44 PC-?.H2_46 PC-?.H2_48 PIKSI_UARTA. PIKSI_UARTA.4 PressSense. PressSense.1
copper on no net: | length 364.6
  Top Layer w0.33: 73.939,14.308 73.939,86.843 ; 76.174,22.936 76.166,14.475 76.896,15.204 87.681,4.42 84.43,1.168 2.261,1.168 -0.813,4.242 -0.813,87.732 5.588,94.132 84.049,94.132 87.732,90.449
  other v2: 83.469,5.351 7.249,91.026 80.949,91.026

## Polygon pours and split planes (outlines as drawn)
DGND on GndPlane (split plane): 87.628,90.371 87.628,81.224 87.626,81.224 87.617,81.204 87.628,81.204 87.629,81.197 87.624,81.155 81.803,81.155 81.803,81.166 81.803,81.155 81.802,81.155 81.801,81.155 81.798,81.155 81.53,81.145 81.264,81.117 81.001,81.069 80.742,81.003 80.488,80.919 80.241,80.816 80.001,80.696 79.771,80.56 79.551,80.407 79.343,80.239 79.147,80.057 78.965,79.861 78.797,79.653 78.644,79.433 78.508,79.203 78.388,78.964 78.286,78.716 78.201,78.463 78.135,78.203 78.087,77.94 78.059,77.674 78.049,77.414 78.04,77.397 78.011,77.301 78.001,77.202 78.001,19.11 78.011,19.011 78.028,18.956 78.024,18.956 78.023,18.956 78.034,18.929 78.044,18.668 78.072,18.402 78.12,18.139 78.186,17.88 78.271,17.626 78.373,17.379 78.493,17.139 78.629,16.909 78.782,16.689 78.95,16.481 79.132,16.285 79.328,16.103 79.536,15.935 79.756,15.782 79.986,15.646 80.226,15.526 80.473,15.424 80.727,15.339 80.986,15.273 81.249,15.225 81.515,15.197 81.759,15.188 81.783,15.175 81.879,15.146 81.978,15.136 87.618,15.136 87.618,4.558 87.622,4.518 84.402,1.297 2.39,1.297 -0.76,4.448 -0.76,87.602 5.565,93.927 84.071,93.927
no net on PowerPlane (split plane): 87.628,90.371 87.628,81.224 87.626,81.224 87.617,81.204 87.628,81.204 87.629,81.197 87.624,81.155 81.803,81.155 81.803,81.166 81.803,81.155 81.802,81.155 81.801,81.155 81.798,81.155 81.53,81.145 81.264,81.117 81.001,81.069 80.742,81.003 80.488,80.919 80.241,80.816 80.001,80.696 79.771,80.56 79.551,80.407 79.343,80.239 79.147,80.057 78.965,79.861 78.797,79.653 78.644,79.433 78.508,79.203 78.388,78.964 78.286,78.716 78.201,78.463 78.135,78.203 78.087,77.94 78.059,77.674 78.049,77.414 78.04,77.397 78.011,77.301 78.001,77.202 78.001,19.11 78.011,19.011 78.028,18.956 78.024,18.956 78.023,18.956 78.034,18.929 78.044,18.668 78.072,18.402 78.12,18.139 78.186,17.88 78.271,17.626 78.373,17.379 78.493,17.139 78.629,16.909 78.782,16.689 78.95,16.481 79.132,16.285 79.328,16.103 79.536,15.935 79.756,15.782 79.986,15.646 80.226,15.526 80.473,15.424 80.727,15.339 80.986,15.273 81.249,15.225 81.515,15.197 81.759,15.188 81.783,15.175 81.879,15.146 81.978,15.136 87.618,15.136 87.618,4.558 87.622,4.518 84.402,1.297 2.39,1.297 -0.76,4.448 -0.76,87.602 5.565,93.927 84.071,93.927

## Other copper
GndPlane (plane layer: these items are gaps in the copper):
  lines w0: 4.978,93.04 86.919,93.04
  lines w0.254: 88.443,42.57 88.697,42.824

## Silkscreen, mask and mechanical layers (free items; w line width, h text height)
Top Overlay:
  rectangle: 22.479,4.775 27.356,9.22
  text "Cornell  / Umbilical Board  / Rev 2.1" at 22.606,9.652 h1.52
Mechanical 1:
  rectangle: 51.13,22.809 76.53,35.509
Mechanical 2:
  lines w0.762: 78.12,77.241 78.145,77.267 ; 78.13,18.948 78.13,77.241 ; 78.163,18.956 ccw(c81.783,18.936) 81.788,15.316 ; 78.178,77.387 cw(c81.798,77.406) 81.803,81.026 86.883,81.026 87.772,81.026 ; 81.839,15.265 87.747,15.265 87.747,4.481 ; 87.757,4.47 84.455,1.168 2.337,1.168 -0.889,4.394 -0.889,87.655 5.512,94.056 84.125,94.056 87.757,90.424 87.757,81.204

## Text inside footprints (layer, text, board x,y; h text height)
B: Top Overlay "-" at 52.009,9.382 h1.52; Top Overlay "-" at 62.584,12.557 h1.52; Top Overlay "+" at 51.859,15.607 h1.52
Mux: Top Overlay "TOL" at 26.746,24.232 h1.27; Top Overlay "VAL" at 26.746,24.232 h1.27; Top Overlay "DEV" at 26.746,24.232 h1.27; Top Overlay "PN" at 26.746,24.232 h1.27; Top Overlay "*" at 24.32,26.654 h1.27; Dimensions "RefDes2" at 26.746,24.232 h1.27; Dimensions "*" at 25.603,25.679 h1.27
PC-?: Top Layer "52" at 77.944,90.291 h1.52; Top Layer "51" at 77.944,87.791 h1.52; Top Layer "52" at 78.044,85.291 h1.52; Top Layer "51" at 78.044,82.791 h1.52; Top Layer "2" at 9.804,91.211 h1.52; Top Layer "1" at 9.804,88.671 h1.52; Top Layer "2" at 9.804,86.131 h1.52; Top Layer "1" at 9.804,83.591 h1.52; Top Layer "H2" at 5.344,88.591 h1.52; Top Layer "H1" at 5.344,84.591 h1.52; Top Layer "Umb" at 12.344,93.751 h1.52; Mechanical 1 "J1" at 51.751,87.485 h0.76